# Altium PCB New Gyro 4.0.PcbDoc (part 1 of 2)
Units mm, origin at the board's own origin, x right, y up, seen from the top; angles counter-clockwise.
Board outline 67.56 x 93.22 mm, 4 copper layers (ANALOG, GND, VCC, DIGITAL); 253 components, 139 nets, 766 pads, 207 vias.
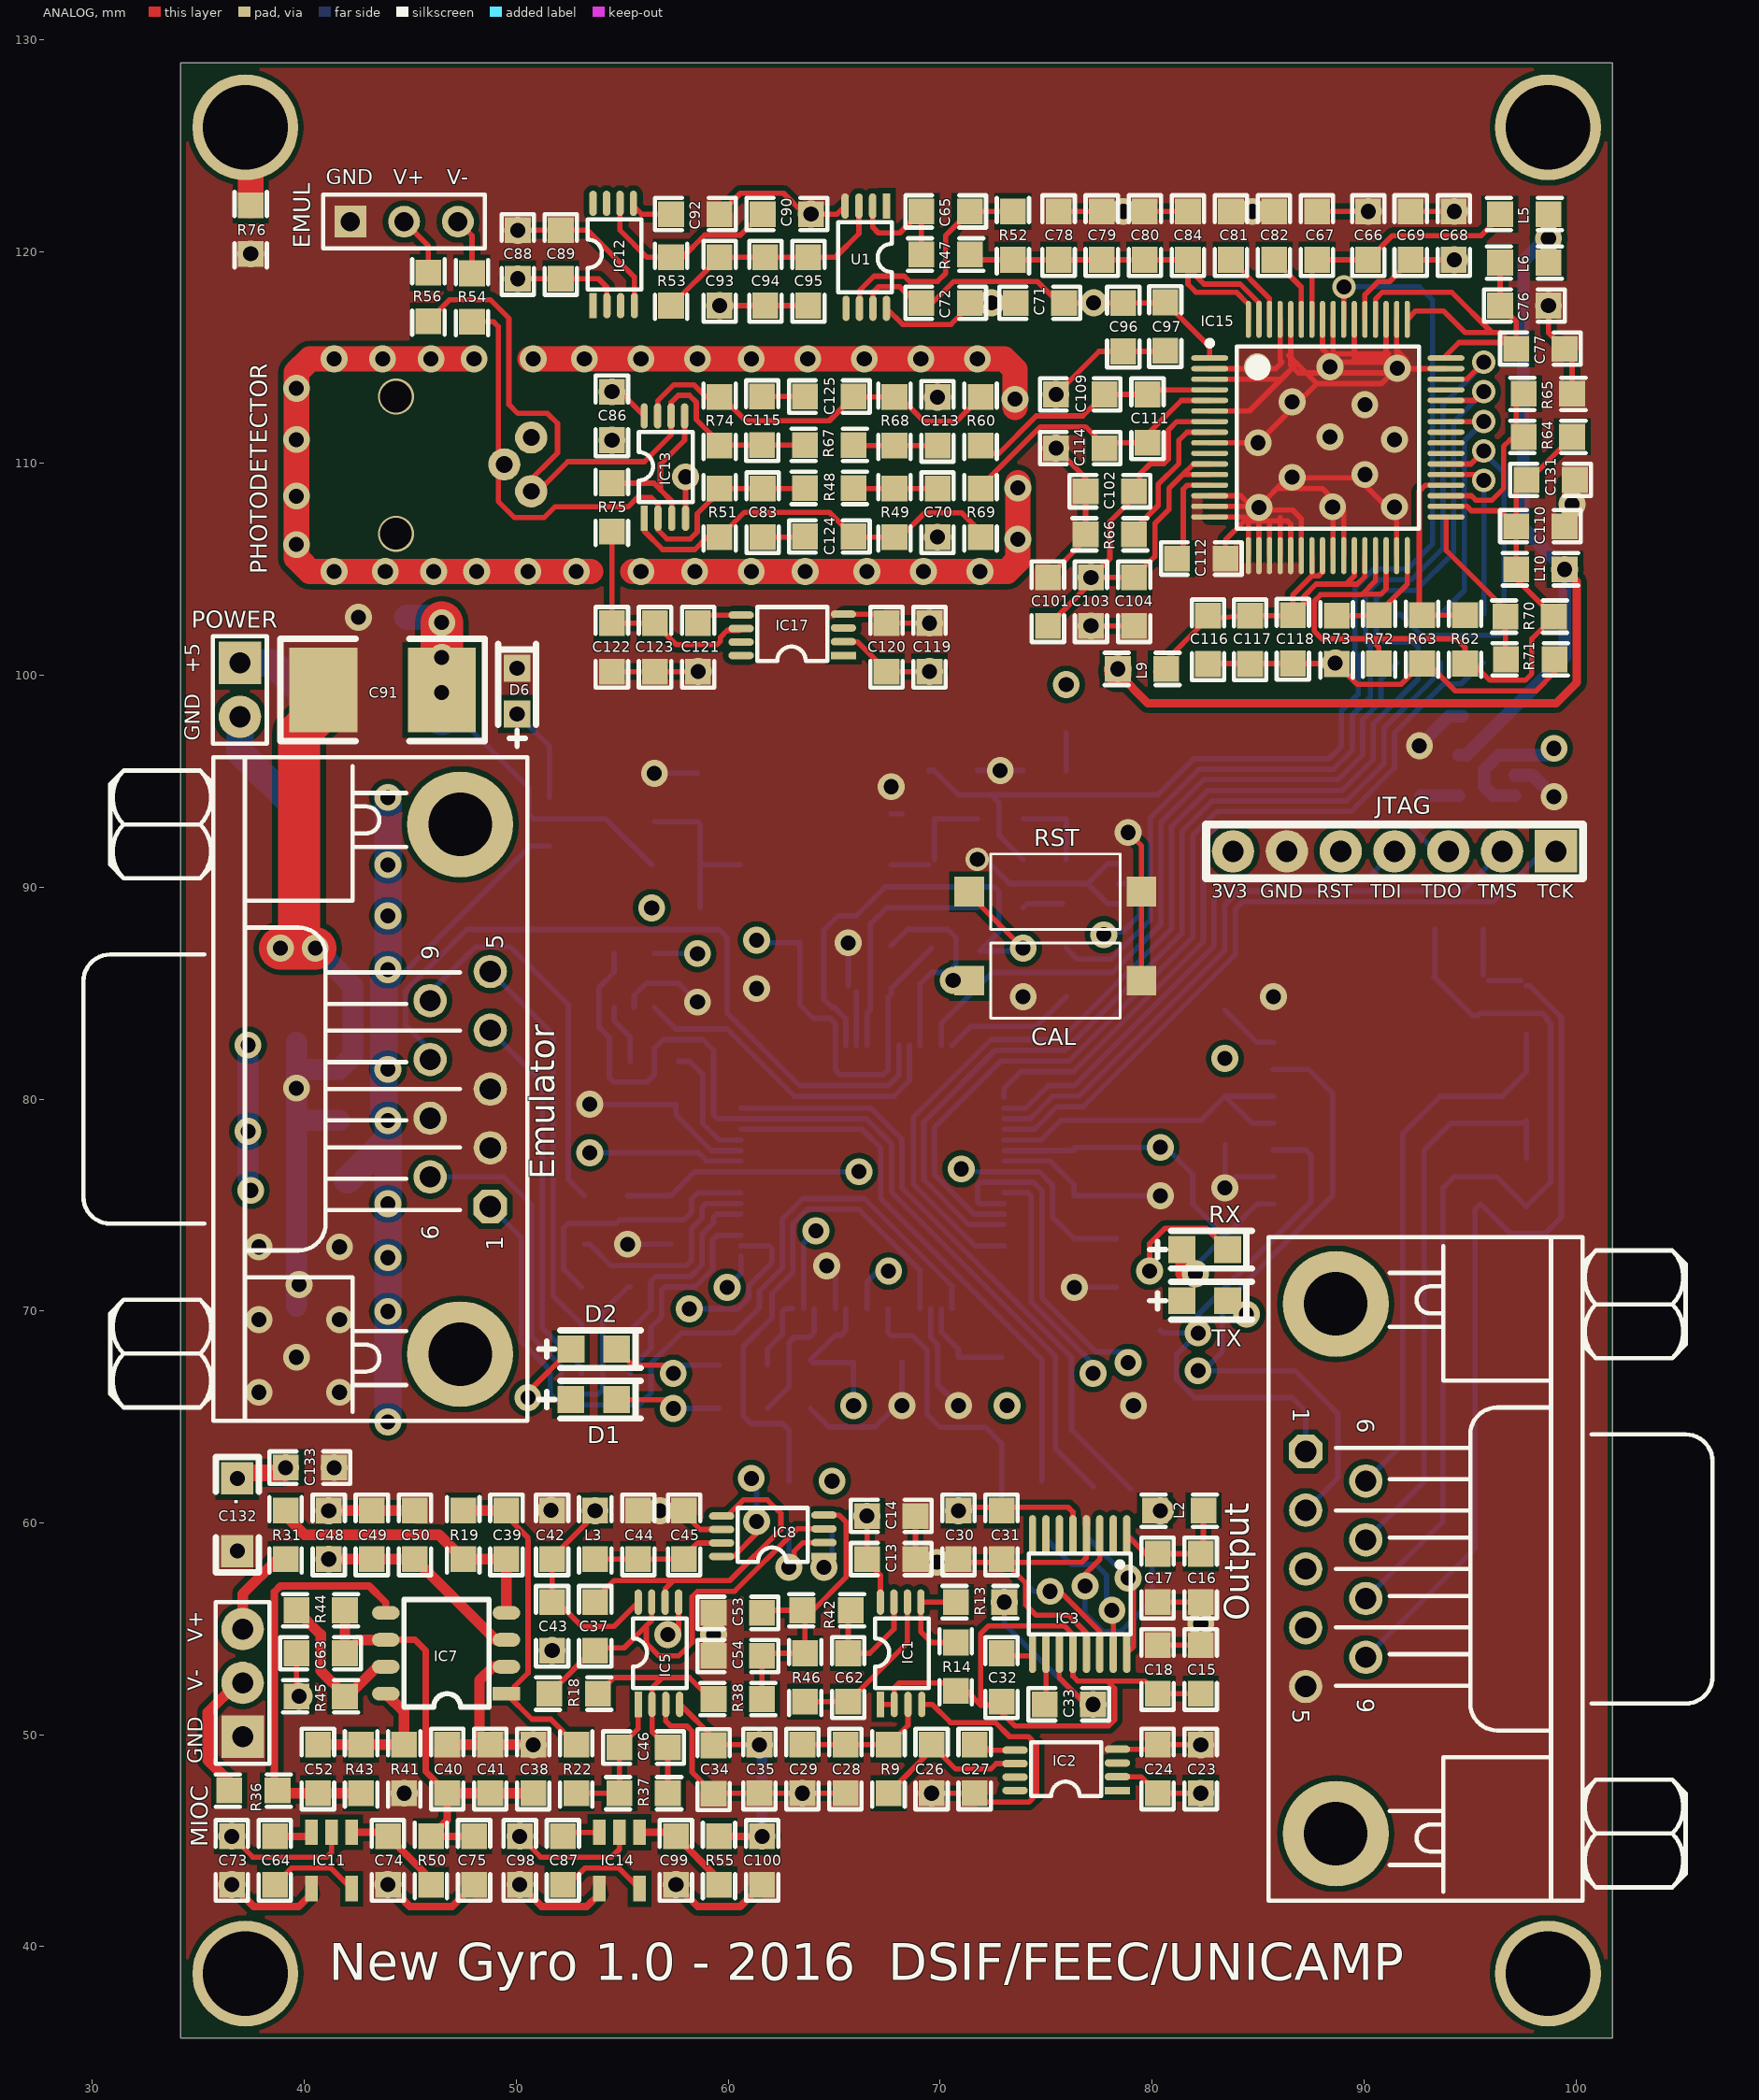
[diagram p0: ANALOG view]
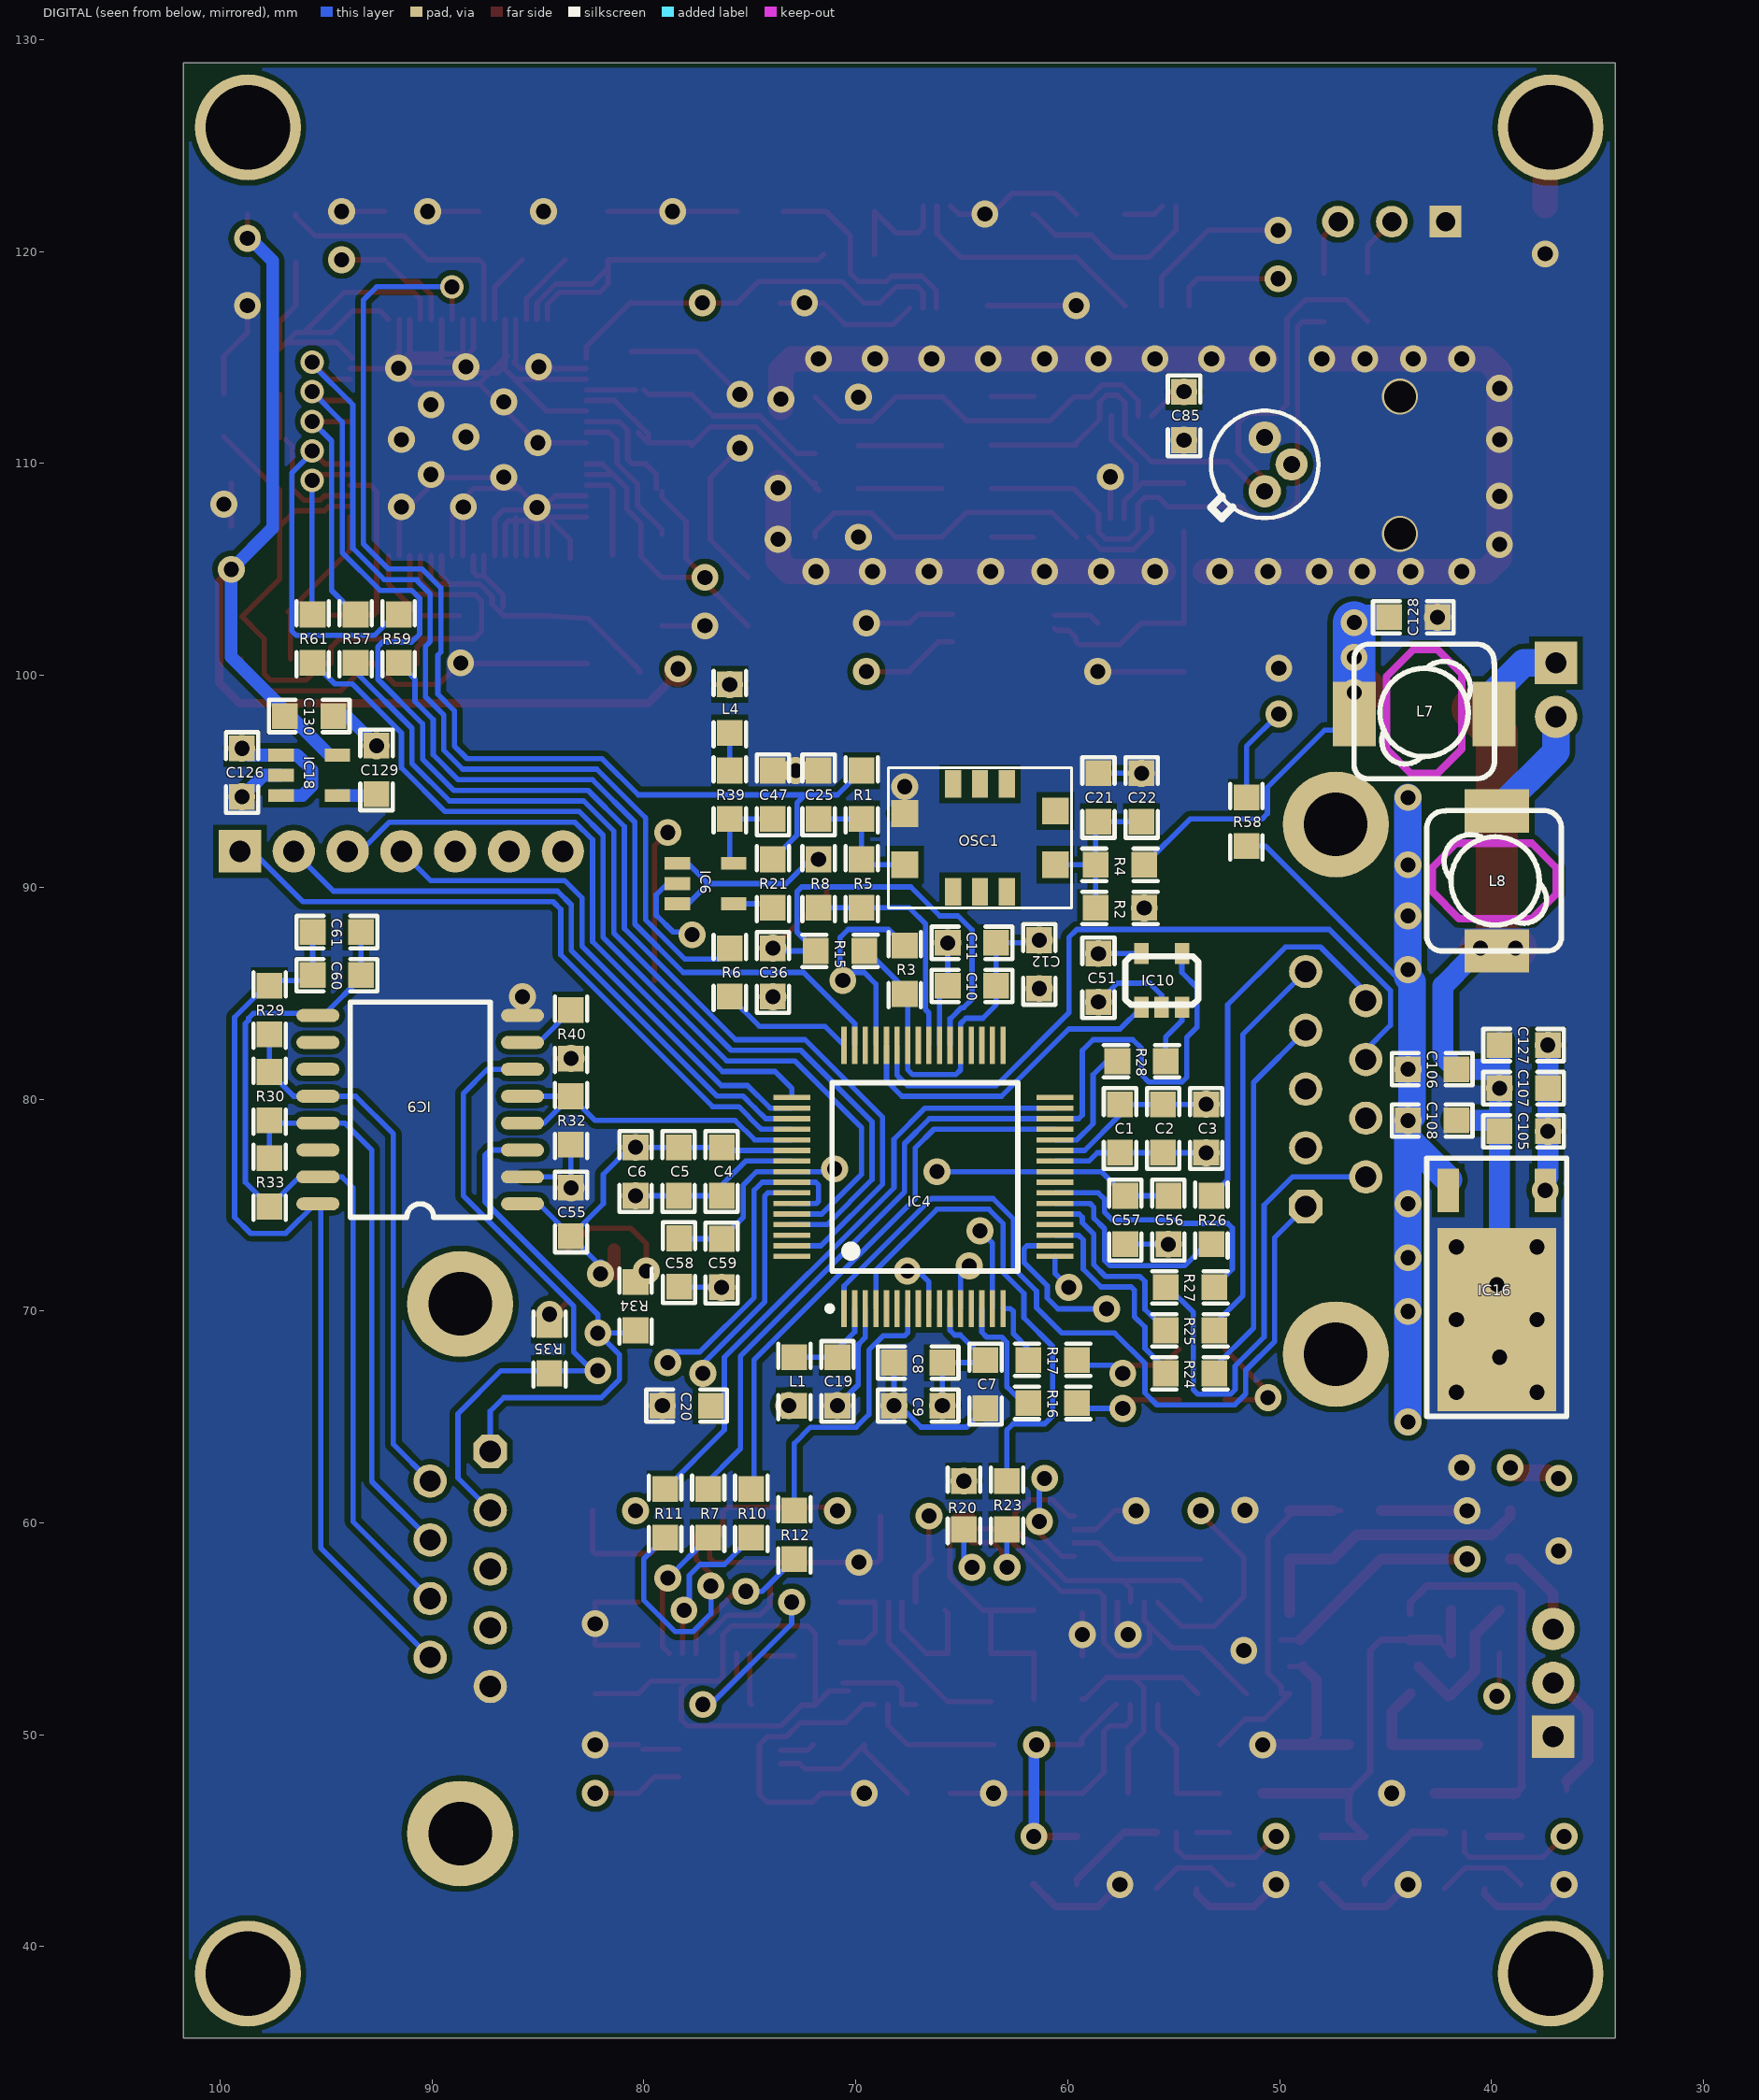
[diagram p1: DIGITAL view, seen from below]
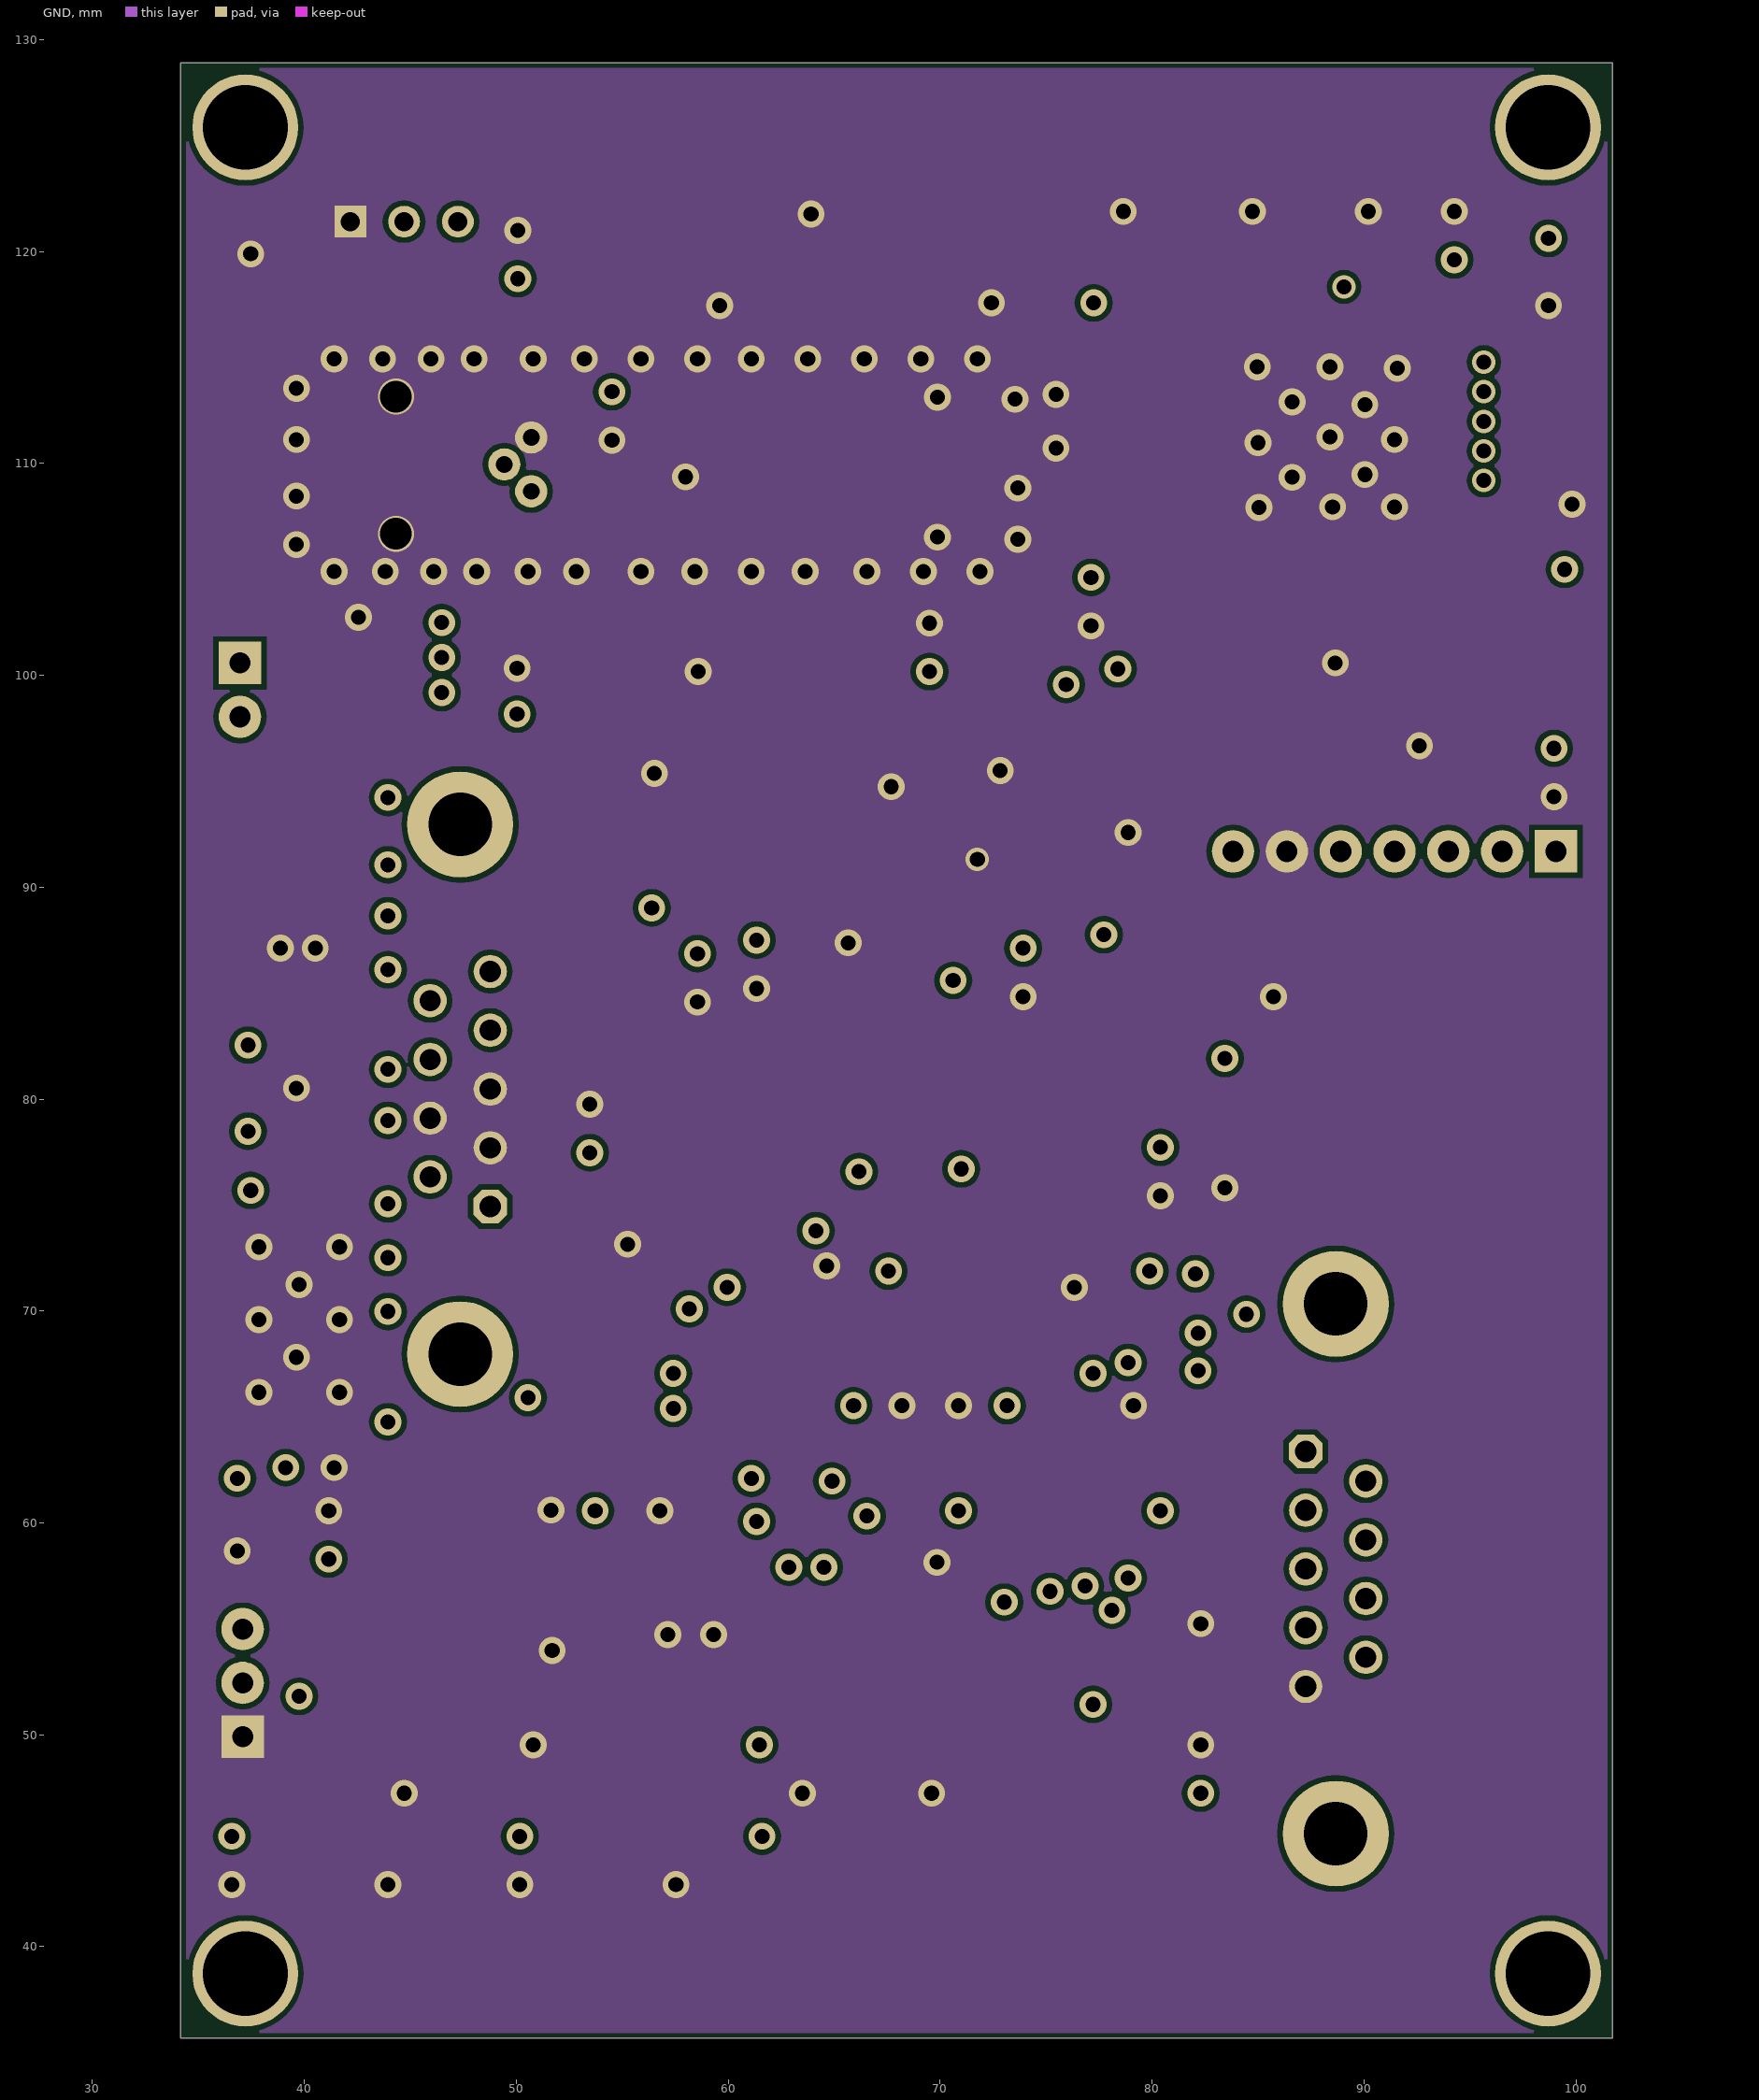
[diagram p2: GND]
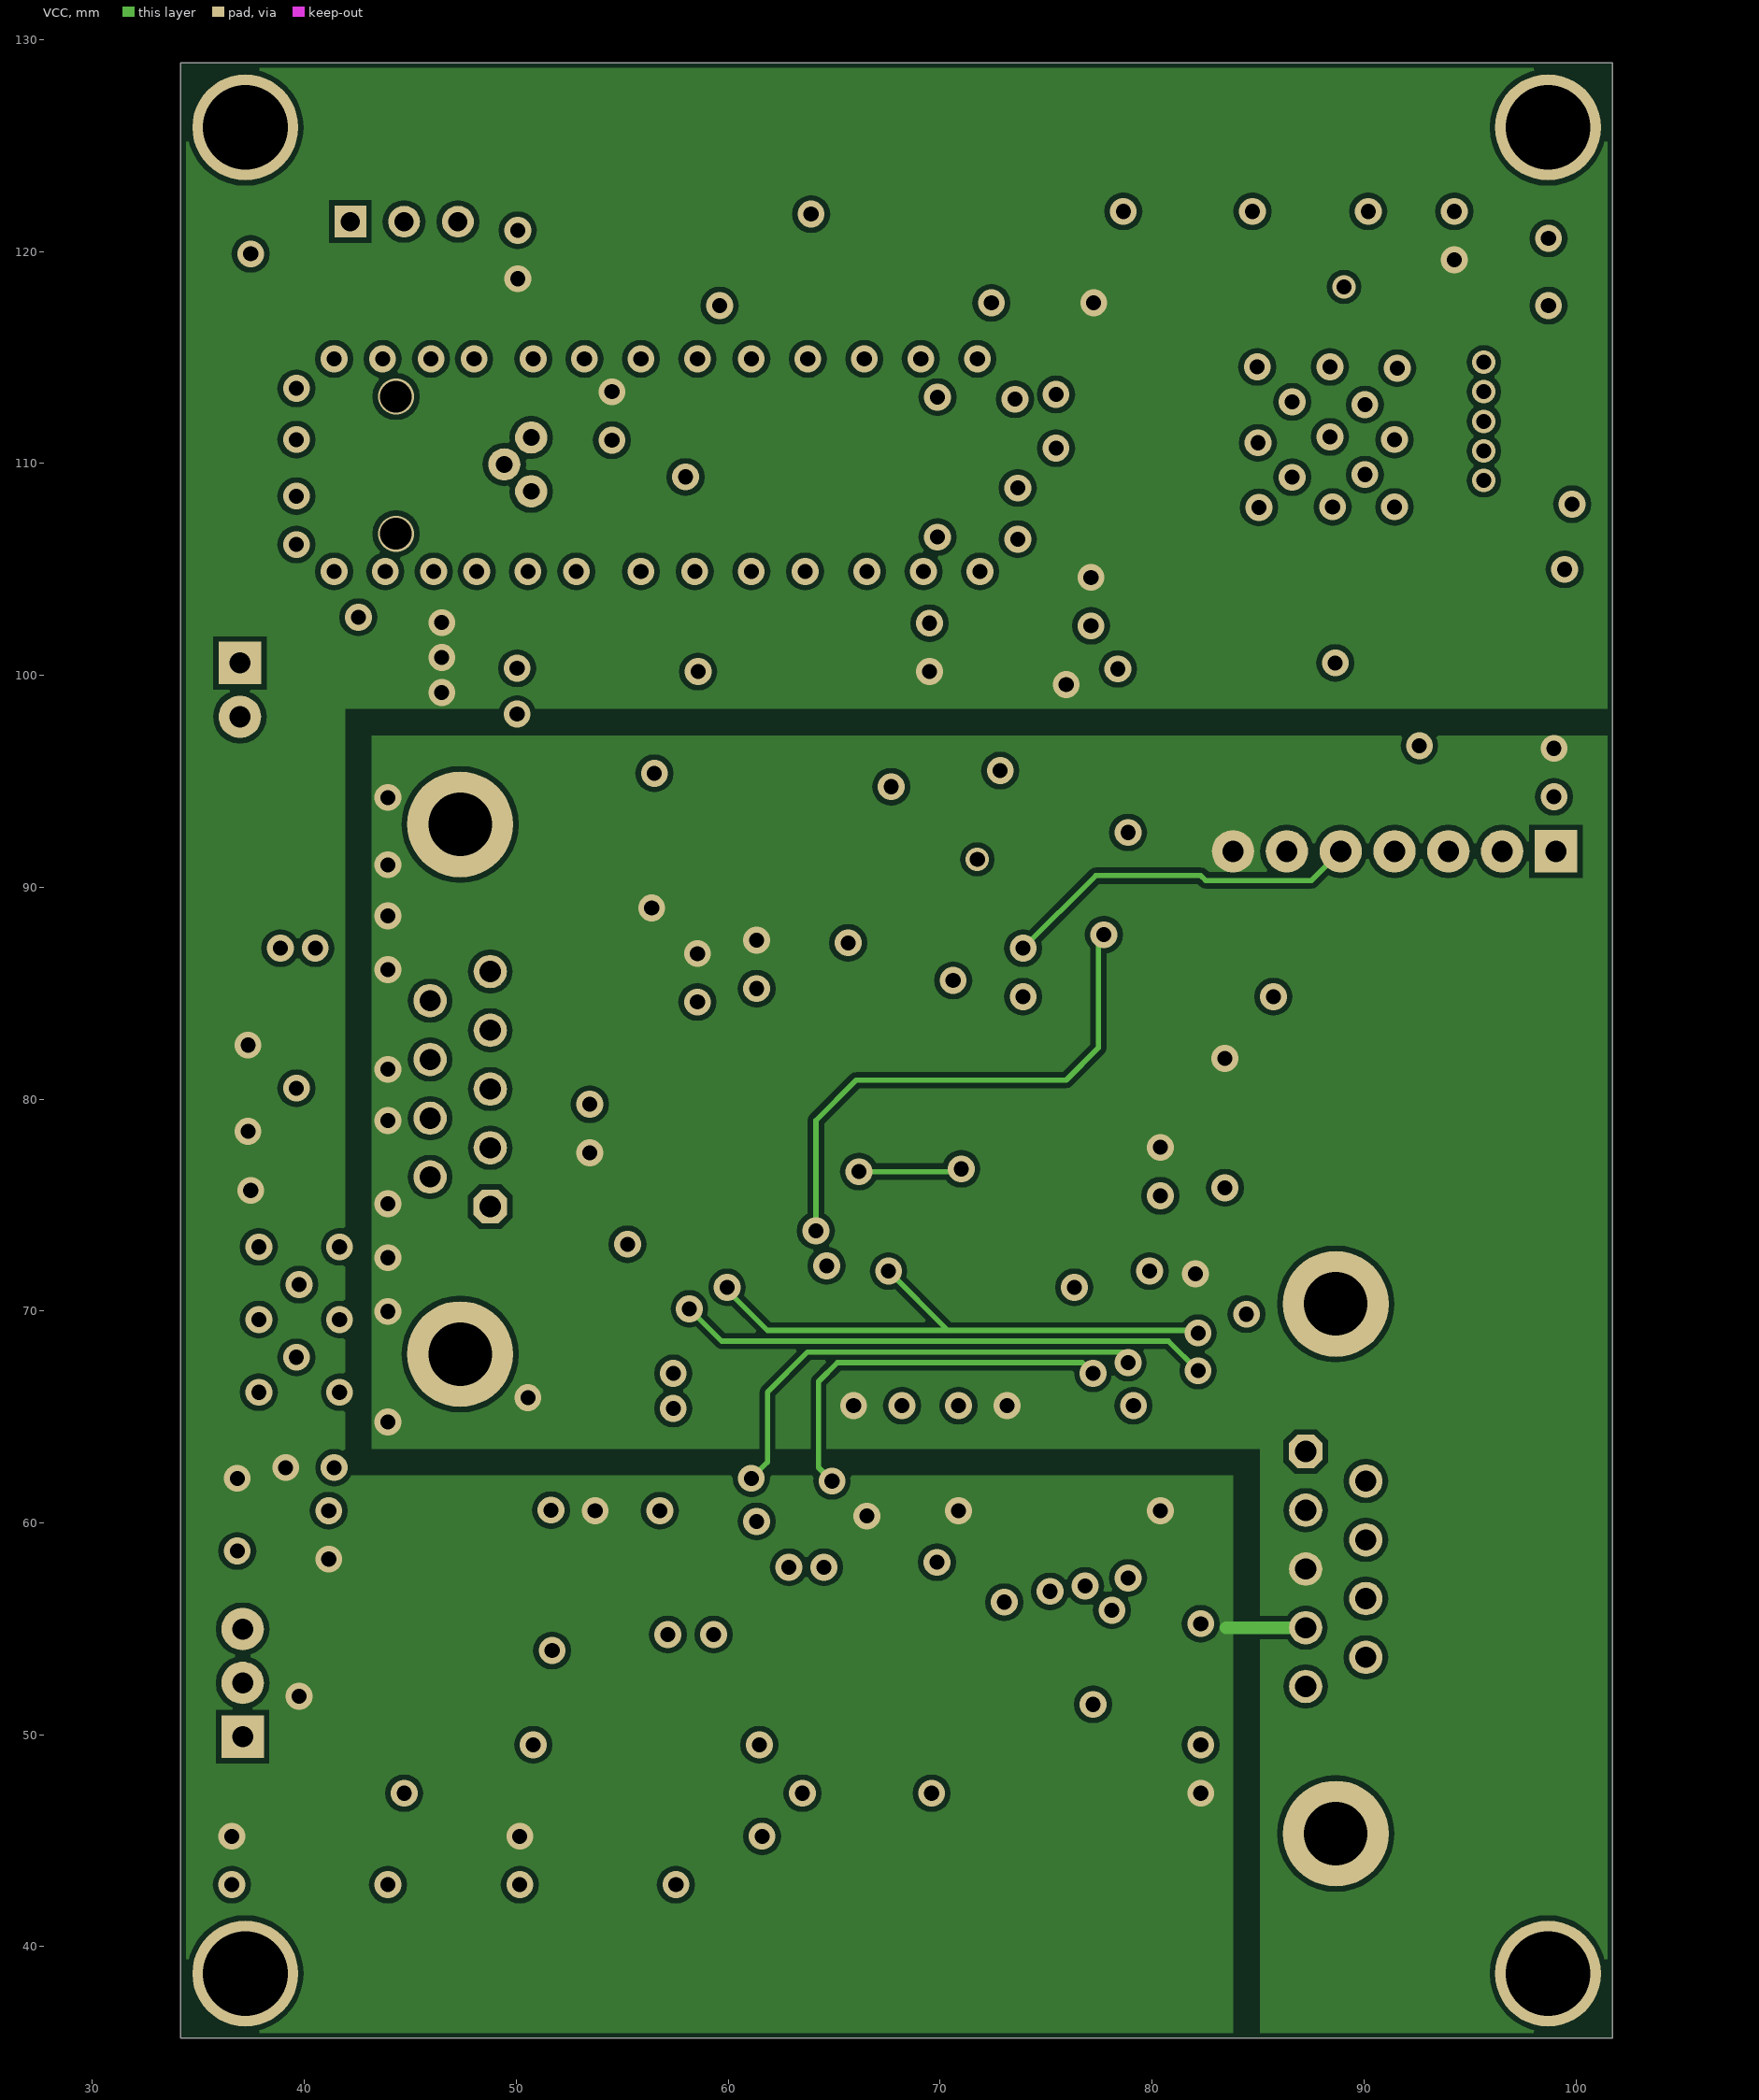
[diagram p3: VCC]

## Layer stack, top to bottom
ANALOG: signal copper 0.0356
Dielectric: core 0.32, FR-4, Dk 4.8
GND: signal copper 0.0356
Dielectric: prepreg 0.32, FR-4, Dk 4.8
VCC: signal copper 0.0356
Dielectric: core 0.32, FR-4, Dk 4.8
DIGITAL: signal copper 0.0356

## Board outline
34.163,35.687 34.163,128.905 101.727,128.905 101.727,35.687

## Design rules (kind name [scope] priority, off if disabled: settings)
Clearance [All] p1: gap=0.25
ComponentClearance [All] p1: gap=0.2 collisioncheckmode=3 verticalgap=0.2 showdistances=FALSE
HoleSize [All] p1: absolutevalues=TRUE maxlimit=3.3 minlimit=0.025 maxpercent=80.000 minpercent=20.000
PlaneConnect [All] p1: planeconnectstyle=Relief reliefexpansion=0.508 reliefentries=4 reliefconductorwidth=0.5 reliefairgap=0.3
PolygonConnect [All] p1: connectstyle=Direct reliefconductorwidth=1 reliefentries=4 polygonreliefangle="90 Angle" airgapwidth=0.3
RoutingVias [All] p1: holewidth=0.711 width=1.27 viastyle="Through Hole" minholewidth=0.711 minwidth=1.27 maxholewidth=0.711 maxwidth=1.27
SilkToSilkClearance [All] p1: silktosilkclearance=0.2
SilkToSolderMaskClearance [IsPad] p1: minsilkscreentomaskgap=0.2 clearancetoexposedcopper=TRUE
SolderMaskExpansion [All] p1: expansion=0.102
Width [All] p1: maxlimit=2 minlimit=0.25 preferedwidth=0.25
23 further rules are at their usual default settings.

## Components (designator, comment, footprint, x,y, rotation, side; value= is the part's Value field where it differs from the comment)
C1 "10n" 0805-cap 57.531,78.613 r270 bottom
C2 "100n" 0805-cap 55.499,78.613 r270 bottom
C3 "1u" 0805-cap 53.467,78.613 r270 bottom
C4 "10n" 0805-cap 76.327,76.581 r90 bottom
C5 "100n" 0805-cap 78.359,76.581 r90 bottom
C6 "1u" 0805-cap 80.391,76.581 r90 bottom
C7 "10n" 0805-cap 63.881,66.548 r90 bottom
C8 "100n" 0805-cap 67.056,67.564 r180 bottom
C9 "1u" 0805-cap 67.056,65.532 r180 bottom
C10 "10n" 0805-cap 64.516,85.344 r180 bottom
C11 "100n" 0805-cap 64.516,87.376 r180 bottom
C12 "1u" 0805-cap 61.341,86.36 r90 bottom
C13 "100n" 0805-cap 67.691,58.293 r180 top
C14 "1u" 0805-cap 67.691,60.325 r180 top
C15 "10u" 0805-cap 82.296,53.086 r270 top
C16 "1u" 0805-cap 82.296,57.404 r270 top
C17 "100n" 0805-cap 80.264,57.404 r270 top
C18 "100n" 0805-cap 80.264,53.086 r270 top
C19 "100n" 0805-cap 70.866,66.675 r90 bottom
C20 "20p" 0805-cap 77.978,65.532 r180 bottom
C21 "100n" 0805-cap 58.547,94.234 r270 bottom
C22 "10n" 0805-cap 56.515,94.234 r90 bottom
C23 "10u" 0805-cap 82.296,48.387 r90 top
C24 "100n" 0805-cap 80.264,48.387 r270 top
C25 "15p" 0805-cap 71.755,94.361 r270 bottom
C26 "22u" 0805-cap 69.596,48.387 r270 top
C27 "22u" 0805-cap 71.628,48.387 r270 top
C28 "22u" 0805-cap 65.532,48.387 r270 top
C29 "10n" 0805-cap 63.5,48.387 r90 top
C30 "4.7" 0805-cap 70.866,59.436 r90 top
C31 "100n" 0805-cap 72.898,59.436 r90 top
C32 "3.3n" 0805-cap 72.898,52.705 r270 top
C33 "10n" 0805-cap 76.073,51.435 r0 top
C34 "1u" 0805-cap 59.309,48.362 r90 top
C35 "100n" 0805-cap 61.468,48.387 r270 top
C36 "100n" 0805-cap 73.914,85.979 r270 bottom
C37 "20pF" 0805-cap 53.721,55.118 r90 top
C38 "1u" 0805-cap 50.8,48.387 r270 top
C39 "15pF" 0805-cap 49.53,59.436 r270 top
C40 "100n" 0805-cap 46.736,48.387 r90 top
C41 "10n" 0805-cap 48.768,48.387 r90 top
C42 "1u" 0805-cap 51.689,59.436 r270 top
C43 "100n" 0805-cap 51.689,55.118 r90 top
C44 "1u" 0805-cap 55.753,59.436 r270 top
C45 "100n" 0805-cap 57.912,59.436 r270 top
C46 "10pF" 0805-cap 56.007,49.403 r0 top
C47 "100n" 0805-cap 73.914,94.361 r270 bottom
C48 "1u" 0805-cap 41.148,59.436 r270 top
C49 "100n" 0805-cap 43.18,59.436 r90 top
C50 "10n" 0805-cap 45.212,59.436 r90 top
C51 "100n" 0805-cap 58.547,85.725 r90 bottom
C52 "15pF" 0805-cap 40.64,48.387 r270 top
C53 "22u" 0805-cap 60.452,55.753 r180 top
C54 "100n" 0805-cap 60.452,53.721 r0 top
C55 "100n" 0805-cap 83.439,74.676 r270 bottom
C56 "1u" 0805-cap 55.245,74.295 r90 bottom
C57 "100n" 0805-cap 57.277,74.295 r90 bottom
C58 "1u" 0805-cap 78.334,72.288 r90 bottom
C59 "100n" 0805-cap 76.327,72.263 r90 bottom
C60 "100n" 0805-cap 94.488,85.852 r180 bottom
C61 "10u" 0805-cap 94.488,87.884 r180 bottom
C62 "10n" 0805-cap 65.659,52.705 r270 top
C63 "100n" 0805-cap 40.767,53.848 r0 top
C64 "1uF" 0805-cap 38.608,44.069 r270 top
C65 "10n" 0805-cap 70.259,121.892 r0 top
C66 "4.7u" 0805-cap 90.198,120.749 r270 top
C67 "100n" 0805-cap 87.785,120.749 r270 top
C68 "4.7u" 0805-cap 94.234,120.749 r90 top
C69 "100n" 0805-cap 92.202,120.749 r90 top
C70 "1n" 0805-cap 69.878,107.668 r270 top
C71 "1u" 0805-cap 74.704,117.574 r180 top
C72 "100n" 0805-cap 70.259,117.574 r0 top
C73 "1uF" 0805-cap 36.576,44.069 r90 top
C74 "1uF" 0805-cap 43.942,44.069 r90 top
C75 "10u" 0805-cap 48.006,44.069 r270 top
C76 "4.7u" 0805-cap 97.564,117.447 r0 top
C77 "100n" 0805-cap 98.326,115.415 r0 top
C78 "47u" 0805-cap 75.593,120.749 r90 top
C79 "47u" 0805-cap 77.625,120.749 r90 top
C80 "22u" 0805-cap 79.657,120.749 r90 top
C81 "1u" 0805-cap 83.721,120.749 r270 top
C82 "1u" 0805-cap 85.753,120.749 r270 top
C83 "0.5p" 0805-cap 61.623,107.668 r90 top
C84 "100n" 0805-cap 81.689,120.749 r270 top
C85 "10u" 0805-cap 54.511,112.24 r270 bottom
C86 "100n" 0805-cap 54.511,112.24 r270 top
C87 "1uF" 0805-cap 52.197,44.069 r270 top
C88 "10u" 0805-cap 50.066,119.86 r90 top
C89 "100n" 0805-cap 52.098,119.86 r270 top
C90 "22u" 0805-cap 62.766,121.765 r0 top
C91 "1m" "CAP 1000u - duplicate" 47.244,99.949 r180 top
C92 "22u" 0805-cap 58.448,121.765 r0 top
C93 "47u" 0805-cap 59.591,118.59 r270 top
C94 "47u" 0805-cap 61.75,118.59 r270 top
C95 "10n" 0805-cap 63.782,118.59 r90 top
C96 "4.7u" 0805-cap 78.641,116.431 r270 top
C97 "100n" 0805-cap 80.622,116.456 r270 top
C98 "1uF" 0805-cap 50.165,44.069 r90 top
C99 "1uF" 0805-cap 57.531,44.069 r90 top
C100 "10u" 0805-cap 61.595,44.069 r270 top
C101 "4.7u" 0805-cap 75.085,103.477 r270 top
C102 "100n" 0805-cap 78.006,108.684 r0 top
C103 "10u" 0805-cap 77.117,103.477 r90 top
C104 "100n" 0805-cap 79.149,103.477 r90 top
C105 "100n" 0805-cap 38.481,78.486 r180 bottom
C106 "100n" 0805-cap 42.799,81.407 r0 bottom
C107 "10u" 0805-cap 38.481,80.518 r0 bottom
C108 "47u" 0805-cap 42.799,78.994 r180 bottom
C109 "100p" 0805-cap 76.609,113.256 r180 top
C110 "100n" 0805-cap 98.326,107.033 r0 top
C111 "750p" 0805-cap 79.784,112.113 r270 top
C112 "1u" 0805-cap 82.324,105.509 r0 top
C113 "1n" 0805-cap 69.878,111.986 r90 top
C114 "100p" 0805-cap 76.609,110.716 r180 top
C115 "0.5p" 0805-cap 61.595,112.014 r270 top
C116 "10u" 0805-cap 82.642,101.674 r270 top
C117 "100n" 0805-cap 84.623,101.674 r270 top
C118 "100n" 0805-cap 86.642,101.699 r270 top
C119 "10u" 0805-cap 69.497,101.318 r90 top
C120 "100n" 0805-cap 67.465,101.318 r270 top
C121 "10u" 0805-cap 58.575,101.318 r270 top
C122 "10u" 0805-cap 54.511,101.318 r90 top
C123 "100n" 0805-cap 56.543,101.318 r90 top
C124 "0.5p" 0805-cap 64.77,106.553 r180 top
C125 "0.5p" 0805-cap 64.77,113.157 r180 top
C126 "1u" 0805-cap 98.966,95.41 r90 bottom
C127 "10u" 0805-cap 38.481,82.55 r0 bottom
C128 "100n" 0805-cap 43.688,102.743 r0 bottom
C129 "10n" 0805-cap 92.616,95.537 r270 bottom
C130 "2.2u" 0805-cap 95.791,98.077 r0 bottom
C131 "4.7u" 0805-cap 98.806,109.22 r180 top
C132 "100u" 1206_Capacitor 36.83,60.452 r270 top
C133 "100n" 0805-cap 40.259,62.611 r180 top
CAL "SW-PB" "SW SMD" 75.565,85.598 r0 top
D1 "STATUS2" LED 52.575,65.817 r0 top
D2 "STATUS" LED 52.578,68.199 r0 top
D6 "Power" LED 50.038,98.171 r90 top
EMUL "Header 4" HDR1X3#1 42.164,121.412 r0 top
Emulator "DB9" DB9FLW 48.768,74.93 r90 top
IC1 "OPA2211 or OPA2209" MSOP8 67.183,51.308 r90 top
IC2 "REF5025" MSOP8 78.486,47.371 r180 top
IC3 "DAC1220" "DBQ 16 TI" 76.581,56.642 r270 top
IC4 "TM4C123GH6PM" PQFP64 66.802,76.327 r90 bottom
IC5 "OPA2140 ou AD8620" MSOP8 55.753,51.308 r90 top
IC6 "SN74LV1T125" SOT-23-5 77.089,90.17 r180 bottom
IC7 "LMP8350 ou THS4130" SO-8 49.53,51.943 r180 top
IC8 "AD5543" MSOP8 64.643,58.42 r180 top
IC9 "ADM2483" SOL-16 85.725,75.057 r0 bottom
IC10 "LM95071" SOT-23 56.515,84.328 r180 bottom
IC11 "TPS60402" SOT-23-5 41.275,44.069 r270 top
IC12 "REF5030" MSOP8 53.622,117.32 r90 top
IC13 "OPA2354, OPA2356 talvez OPA2140" MSOP8 56.035,107.287 r90 top
IC14 "TPS60402" SOT-23-5 54.864,44.069 r270 top
IC15 "ADS1672" TM4C123GH6PM_PQFP64 88.293,111.224 r0 top
IC16 "TLV2217-33KTPR" KTP 37.465,75.692 r0 bottom
IC17 "REF5025" MSOP8 65.56,100.937 r180 top
IC18 "LP2985" SOT-23-5 95.791,95.283 r180 bottom
JTAG "JTAG_ARM" HDR1X7 99.06,91.694 r180 top
L1 "3.9uH" 0805 72.898,66.675 r90 bottom
L2 "1uH" 0805 81.28,60.579 r0 top
L3 "1uH" 0805 53.721,59.436 r270 top
L4 "1uH" 0805 75.946,98.425 r270 bottom
L5 "1uH" 0805 97.564,121.765 r180 top
L6 "1uH" 0805 97.564,119.479 r0 top
L7 "10uH" SPD62 46.482,98.171 r180 bottom
L8 "10uH" SPD62 39.751,86.995 r90 bottom
L9 "1uH" 0805 79.53,100.302 r0 top
L10 "1uH" 0805 98.326,105.001 r0 top
MIOC "Header 3" HDR1X3#2 37.084,49.911 r90 top
OSC1 "XTAL_10MHz" OSC_D75A_ 64.135,92.71 r0 bottom
Output "DB9" DB9FLW 87.249,63.373 r270 top
PHOTODETECTOR "BPX65" otico 50.701,108.684 r0 top
POWER "Header 2" HDR1X2 36.957,100.584 r270 top
R1 "50R" 0805 69.723,94.361 r90 bottom
R2 "0R" 0805 57.531,89.027 r180 bottom
R3 "10k" 0805 67.691,86.106 r90 bottom
R4 "0R" 0805 57.531,91.059 r180 bottom
R5 "1k" 0805 69.723,90.17 r270 bottom
R6 "50R" 0805 75.946,85.979 r270 bottom
R7 "100" 0805 76.962,60.452 r90 bottom
R8 "2k" 0805 71.755,90.17 r270 bottom
R9 "100" 0805 67.564,48.387 r90 top
R10 "100" 0805 74.93,60.452 r90 bottom
R11 "100" 0805 78.994,60.452 r90 bottom
R12 "100" 0805 72.898,59.436 r90 bottom
R13 "20k" 0805 71.882,56.261 r0 top
R14 "5k" 0805 70.739,53.213 r270 top
R15 "10k" 0805 70.739,86.995 r0 bottom
R16 "1k" 0805 60.706,65.659 r180 bottom
R17 "1k" 0805 60.706,67.691 r180 bottom
R18 "5k" 0805 52.705,51.943 r180 top
R19 "5k" 0805 47.498,59.436 r90 top
R20 "100" 0805 64.897,60.833 r270 bottom
R21 "50R" 0805 73.914,90.17 r90 bottom
R22 "1k5" 0805 52.832,48.387 r270 top
R23 "100" 0805 62.865,60.833 r270 bottom
R24 "0" 0805 54.229,67.056 r0 bottom
R25 "50R" 0805 54.229,69.088 r0 bottom
R26 "0" 0805 53.213,74.295 r270 bottom
R27 "50R" 0805 54.229,71.12 r180 bottom
R28 "50R" 0805 56.515,81.788 r0 bottom
R29 "470" 0805 97.663,84.201 r90 bottom
R30 "120" 0805 97.663,80.137 r270 bottom
R31 "20" 0805 39.116,59.436 r90 top
R32 "1k5" 0805 83.439,78.994 r90 bottom
R33 "470" 0805 97.663,76.073 r90 bottom
R34 "1k" 0805 80.391,70.231 r90 bottom
R35 "1k" 0805 84.455,68.199 r90 bottom
R36 "20" 0805 37.592,47.371 r0 top
R37 "10k" 0805 56.007,47.244 r0 top
R38 "10k" 0805 60.452,51.689 r180 top
R39 "10R" 0805 75.946,94.361 r270 bottom
R40 "0" 0805 83.439,83.058 r270 bottom
R41 "1k5" 0805 44.704,48.387 r270 top
R42 "100" 0805 64.643,55.88 r0 top
R43 "5k" 0805 42.672,48.387 r90 top
R44 "inf" 0805 40.767,55.88 r0 top
R45 "0" 0805 40.767,51.816 r0 top
R46 "1k" 0805 63.627,52.705 r270 top
R47 "1k" 0805 70.259,119.86 r0 top
R48 "~33k 1%" 0805 64.77,108.839 r0 top
R49 "1k 1%" 0805 67.846,107.668 r270 top
R50 "10" 0805 45.974,44.069 r90 top
R51 "100k 1%" 0805 59.591,107.668 r270 top
R52 "100" 0805 73.434,120.749 r270 top
R53 "100" 0805 57.305,118.59 r270 top
R54 "100k 1%" 0805 47.907,117.828 r270 top
R55 "10" 0805 59.563,44.069 r90 top
R56 "100k 1%" 0805 45.847,117.856 r90 top
R57 "50R" 0805 93.599,101.727 r270 bottom
R58 "2M" 0805 51.562,93.091 r270 bottom
R59 "50R" 0805 91.567,101.727 r270 bottom
R60 "10" 0805 71.91,111.986 r270 top
R61 "50R" 0805 95.631,101.727 r270 bottom
R62 "10k" 0805 94.77,101.699 r90 top
R63 "0" 0805 92.738,101.699 r90 top
R64 "10k" 0805 98.679,111.252 r180 top
R65 "0" 0805 98.679,113.284 r180 top
R66 "7.5k" 0805 78.006,106.652 r0 top
R67 "~33k 1%" 0805 64.77,110.871 r0 top
R68 "1k 1%" 0805 67.846,111.986 r90 top
R69 "" 0805 71.91,107.668 r90 top
R70 "10k" 0805 97.818,102.771 r180 top
R71 "0" 0805 97.843,100.752 r180 top
R72 "10k" 0805 90.706,101.699 r90 top
R73 "0" 0805 88.713,101.674 r90 top
R74 "100k 1%" 0805 59.591,111.986 r90 top
R75 "0R" 0805 54.511,107.922 r270 top
R76 "1k" 0805 37.465,121.031 r270 top
RST "SW-PB" "SW SMD" 75.565,89.789 r0 top
RX "RX" LED 81.407,72.898 r0 top
TX "TX" LED 81.407,70.485 r0 top
U1 "OPA211" MSOP8 67.465,122.273 r270 top

## Footprints (in the part's own frame and the unit in brackets; to place one, negate y for a bottom-side part, rotate by r counter-clockwise, add the part's x,y. Pads: shape width x height; smd on the part's side, far side on the other; paste and mask are expansions set on the pad)
0805 [mil]
  rect 48x48 smd: 1(-45,0) 2(45,0)
  silkscreen extent -70,-30 70,30
0805-cap [mil]
  rect 48x48 smd: 1(-45,0) 2(45,0)
  silkscreen extent -75,-30 75,30
1206_Capacitor [mil]
  rect 60x60 smd: 1(-65,0) 2(70,0)
  silkscreen extent -105,-40 110,40
"CAP 1000u - duplicate" [mm]
  rect 3.2x4 smd: 1(0.762,0.635) 2(6.35,0.635)
  silkscreen extent -1.27,-1.78 8.38,3.05
DB9FLW [mil]
  oct 62x62 hole 39.37: 1(0,0)
  round 62 hole 39.37: 2(109.17,0) 3(218.33,0) 4(327.5,0) 5(436.67,0) 6(55,111.67) 7(164.17,111.67) 8(273.33,111.67) 9(382.5,111.67)
  round 196.67 hole 118.11: BO1(-274.17,55.83) BO2(710,55.83)
  silkscreen extent -398,-69 835,756
"DBQ 16 TI" [mm]
  oval 1.85x0.35 smd: 1(-2.8,2.222) 2(-2.8,1.587) 3(-2.8,0.952) 4(-2.8,0.317) 5(-2.8,-0.318) 6(-2.8,-0.953) 7(-2.8,-1.588) 8(-2.8,-2.223) 9(2.8,-2.222) 10(2.8,-1.587) 11(2.8,-0.952) 12(2.8,-0.317) 13(2.8,0.318) 14(2.8,0.953) 15(2.8,1.588) 16(2.8,2.223)
  silkscreen extent -1.91,-2.4 1.91,2.4
HDR1X2 [mm] "Connector; Header; 2 Position"
  rect 2x2 hole 1: 1(0,0)
  round 2 hole 1: 2(2.54,0)
  silkscreen extent -1.27,-1.27 3.81,1.27
HDR1X3#1 [mm] "Connector; Header; 3 Position"
  rect 1.5x1.5 hole 0.9: 1(0,0)
  round 1.5 hole 0.9: 2(2.54,0) 3(5.08,0)
  silkscreen extent -1.27,-1.27 6.35,1.27
HDR1X3#2 [mm] "Connector; Header; 3 Position"
  rect 2x2 hole 1: 1(0,0)
  round 2 hole 1: 2(2.54,0) 3(5.08,0)
  silkscreen extent -1.27,-1.27 6.35,1.27
HDR1X7 [mm] "Connector; Header; 6 Position"
  rect 2x2 hole 1: 1(0,0)
  round 2 hole 1: 2(2.54,0) 3(5.08,0) 4(7.62,0) 5(10.16,0) 6(12.7,0) 7(15.24,0)
  silkscreen extent -1.27,-1.27 16.51,1.27
KTP [mil]
  rect 40x80 smd: 1(0,0) 3(180,0)
  rect 220x340 smd: 2(90,240)
  silkscreen extent -40,-60 220,420
LED [mil]
  rect 50x50 smd: A(0,0) K(85,0)
  silkscreen extent -60,-35 130,35
MSOP8 [mm]
  rect 1.2x0.35 smd: 1(0.127,0)
  oval 1.2x0.35 smd: 2(0.127,-0.65) 3(0.127,-1.3) 4(0.127,-1.95) 5(4.953,-1.905) 6(4.953,-1.27) 7(4.953,-0.635) 8(4.953,0)
  silkscreen extent 0.89,-2.29 4.19,0.25
OSC_D75A_ [mil]
  rect 30x51 smd: 1(-50,-85) 2(0,-85) 3(50,-85) 6(50,115) 7(0,115) 8(-50,115)
  rect 50x50 smd: 4(140,-30) 5(140,65) 9(-140,65) 10(-140,-35)
  silkscreen extent -170,-115 170,145
otico [mil]
  round 60 hole 31: A(0,0) K(-50,50) S(0,100)
PQFP64 [mm]
  rect 1.75x0.25 smd: 1(-6.21,3.75) 2(-6.21,3.25) 3(-6.21,2.75) 4(-6.21,2.25) 5(-6.21,1.75) 6(-6.21,1.25) 7(-6.21,0.75) 8(-6.21,0.25) 9(-6.21,-0.25) 10(-6.21,-0.75) 11(-6.21,-1.25) 12(-6.21,-1.75) 13(-6.21,-2.25) 14(-6.21,-2.75) 15(-6.21,-3.25) 16(-6.21,-3.75) 33(6.21,-3.75) 34(6.21,-3.25) 35(6.21,-2.75) 36(6.21,-2.25) 37(6.21,-1.75) 38(6.21,-1.25) 39(6.21,-0.75) 40(6.21,-0.25) 41(6.21,0.25) 42(6.21,0.75) 43(6.21,1.25) 44(6.21,1.75) 45(6.21,2.25) 46(6.21,2.75) 47(6.21,3.25) 48(6.21,3.75)
  rect 0.25x1.75 smd: 17(-3.75,-6.21) 18(-3.25,-6.21) 19(-2.75,-6.21) 20(-2.25,-6.21) 21(-1.75,-6.21) 22(-1.25,-6.21) 23(-0.75,-6.21) 24(-0.25,-6.21) 25(0.25,-6.21) 26(0.75,-6.21) 27(1.25,-6.21) 28(1.75,-6.21) 29(2.25,-6.21) 30(2.75,-6.21) 31(3.25,-6.21) 32(3.75,-6.21) 49(3.75,6.21) 50(3.25,6.21) 51(2.75,6.21) 52(2.25,6.21) 53(1.75,6.21) 54(1.25,6.21) 55(0.75,6.21) 56(0.25,6.21) 57(-0.25,6.21) 58(-0.75,6.21) 59(-1.25,6.21) 60(-1.75,6.21) 61(-2.25,6.21) 62(-2.75,6.21) 63(-3.25,6.21) 64(-3.75,6.21)
  silkscreen extent -6.33,-4.44 4.44,4.55
SO-8 [mm]
  rect 1.3x0.65 smd: 1(0,0)
  oval 1.3x0.65 smd: 2(0,-1.27) 3(0,-2.54) 4(0,-3.81) 5(5.69,-3.81) 6(5.69,-2.54) 7(5.69,-1.27) 8(5.69,0)
  silkscreen extent 0.81,-4.44 4.83,0.64
SOL-16 [mil]
  oval 80x24 smd: 1(0,0) 2(0,-50) 3(0,-100) 4(0,-150) 5(0,-200) 6(0,-250) 7(0,-300) 8(0,-350) 9(380,-350) 10(380,-300) 11(380,-250) 12(380,-200) 13(380,-150) 14(380,-100) 15(380,-50) 16(380,0)
  silkscreen extent 60,-375 320,25
SOT-23 [mil]
  rect 27x39 smd: 1(0,0) 2(37.5,0) 3(75,0) 4(75,100) 5(0,100)
  silkscreen extent -30,5 105,95
SOT-23-5 [mm] "SOT23, 5-Leads, Body 2,90x2,80mm, Pitch 0,95mm, IPC Medium Density"
  rect 1.2x0.6 smd: 1(-1.327,0.95) 2(-1.327,0) 3(-1.327,-0.95) 4(1.327,-0.95) 5(1.327,0.95)
  body extent -0.87,-1.52 0.87,1.53, height 1.45
SPD62 [mil]
  rect 80x120 smd: 1(0,0) 2(260,0)
  ANALOG keep-out lines w14: 200,-65 155,-110 105,-110 60,-65 60,70 110,120 155,120 200,75 200,-65
  silkscreen extent 0,-120 261,130
"SW SMD" [mm] "smal switch smd"
  rect 1.4x1.4 smd: 1(-4.191,0) 2(3.937,0)
  silkscreen extent -3.17,-1.78 2.92,1.78
TM4C123GH6PM_PQFP64 [mm] "PQFP64 - ARM M4F Texas Microcontroller"
  oval 1.75x0.25 smd: 1(-5.575,3.75) 2(-5.575,3.25) 3(-5.575,2.75) 4(-5.575,2.25) 5(-5.575,1.75) 6(-5.575,1.25) 7(-5.575,0.75) 8(-5.575,0.25) 9(-5.575,-0.25) 10(-5.575,-0.75) 11(-5.575,-1.25) 12(-5.575,-1.75) 13(-5.575,-2.25) 14(-5.575,-2.75) 15(-5.575,-3.25) 16(-5.575,-3.75) 33(5.575,-3.75) 34(5.575,-3.25) 35(5.575,-2.75) 36(5.575,-2.25) 37(5.575,-1.75) 38(5.575,-1.25) 39(5.575,-0.75) 40(5.575,-0.25) 41(5.575,0.25) 42(5.575,0.75) 43(5.575,1.25) 44(5.575,1.75) 45(5.575,2.25) 46(5.575,2.75) 47(5.575,3.25) 48(5.575,3.75)
  oval 0.25x1.75 smd: 17(-3.75,-5.575) 18(-3.25,-5.575) 19(-2.75,-5.575) 20(-2.25,-5.575) 21(-1.75,-5.575) 22(-1.25,-5.575) 23(-0.75,-5.575) 24(-0.25,-5.575) 25(0.25,-5.575) 26(0.75,-5.575) 27(1.25,-5.575) 28(1.75,-5.575) 29(2.25,-5.575) 30(2.75,-5.575) 31(3.25,-5.575) 32(3.75,-5.575) 49(3.75,5.575) 50(3.25,5.575) 51(2.75,5.575) 52(2.25,5.575) 53(1.75,5.575) 54(1.25,5.575) 55(0.75,5.575) 56(0.25,5.575) 57(-0.25,5.575) 58(-0.75,5.575) 59(-1.25,5.575) 60(-1.75,5.575) 61(-2.25,5.575) 62(-2.75,5.575) 63(-3.25,5.575) 64(-3.75,5.575)
  silkscreen extent -5.7,-4.3 4.3,4.57, body extent -5,-5 5,5, height 1.45

## Part data
C1 C2 C3 C4 C5 C6 C7 C8 C9 C10 C11 C12 C13 C14 C15 C16 C17 C18 C19 C20 C21 C22 C23 C24 C25 C29 C30 C31 C32 C33 C34 C35 C36 C37 C38 C39 C40 C41 C42 C43 C44 C45 C46 C47 C48 C49 C50 C51 C52 C54 C55 C56 C57 C58 C59 C60 C62 C63 C64 C65 C66 C67 C68 C69 C70 C71 C72 C73 C74 C75 C76 C77 C81 C82 C83 C84 C85 C86 C87 C88 C89 C95 C96 C97 C98 C99 C100 C101 C102 C103 C104 C105 C106 C109 C110 C111 C112 C113 C114 C115 C116 C117 C118 C119 C120 C121 C122 C123 C124 C125 C126 C128 C129 C130 C131 C133: library part CAP, "Capacitor Thick film"
C26 C27 C28 C53 C78 C79 C80 C90 C91 C92 C93 C94 C107 C108 C127 C132: library part CAPT, "Capacitor Tântalo SMD"
C61: library part "CAPACITOR POL", "Capacitor Tântalo"
CAL RST: library part SW
D1 D2 D6 RX TX: library part LED_CV, "SMD LED 0805 package"
EMUL: library part "Header 3", "Header, 3-Pin"
IC1 IC5 IC13: library part AMPOPDUAL
IC2 IC12 IC17: library part ADR440AMZ
IC4: "ARM M4F Texas"
IC6: "Single Power Supply Single Buffer Gate with 3-State Output CMOS Logic  Level Shifter"
IC7: library part THS4505, "WIDEBAND, LOW-DISTORTION, FULLY DIFFERENTIAL AMPLIFIER"
IC8: "16 Bit SPI DAC"
IC11 IC14: library part TPS60401, "Charge Pump Inverter"
IC15: "625kSPS, 24-Bit Analog-to-Digital Converter"
IC16: library part LM78L05AC/TO3_0
L1 L2 L3 L4 L5 L6 L7 L8 L9 L10: library part L
MIOC: "Header, 3-Pin"
OSC1: library part XTAL_D75A
PHOTODETECTOR: library part BYW29-150
POWER: "Header, 2-Pin"
R1 R5 R8 R21 R39: library part RES, "Resistor"
R2 R3 R4 R15 R16 R17 R29 R30 R31 R33 R34 R35 R36 R58 R75 R76: library part R06, "Resistor Thick film 5%"
R6 R7 R9 R10 R11 R12 R13 R14 R18 R19 R20 R22 R23 R24 R25 R26 R27 R28 R32 R37 R38 R40 R41 R42 R43 R44 R45 R46 R47 R48 R49 R50 R51 R52 R53 R54 R55 R56 R57 R59 R60 R61 R62 R63 R64 R65 R66 R67 R68 R69 R70 R71 R72 R73 R74: library part R08, "Resistor Thick film 1%"

## Free pads (board coordinates)
  round 5 hole 4: 0(37.211,38.735) 0(37.211,125.857) 0(98.679,38.735) 0(98.679,125.857)

## Via types
v1: diameter 1.27, hole 0.711, ANALOG to DIGITAL, 198 vias
v2: diameter 1.1, hole 0.711, ANALOG to DIGITAL, 7 vias
v3: diameter 1.7, hole 1.5, ANALOG to DIGITAL, 2 vias

## Nets (pads, with @x,y where several pads share a name; then routed paths per layer and width w, separated by ;. In a path a pad name is that pad's centre, name@x,y a point inside that pad or via, vN(x,y) a via of type N, cw(c..) or ccw(c..) an arc to the next point about the centre after c; other vN are vias at no path point)
+3V3D: C1.2 C2.2 C3.2 C4.2 C5.2 C6.2 C7.2 C8.2 C9.2 C10.2 C11.2 C12.2 C51.2 C55.2 C106.2 C108.1 C126.2 D1.A D2.A IC4.11 IC4.26 IC4.37 IC4.42 IC4.54 IC9.1 IC10.5 IC16.3 IC18.1 IC18.3 JTAG.7 L1.1 Output.3 R2.2 R3.1 R15.1 R40.2 R58.2 RX.A TX.A | length 108.2
  ANALOG w0.25: D1.A@52.575,65.817 50.642,65.817 v1(50.546,65.913) 50.546,66.167 D2.A@52.578,68.199 ; v1(65.913,65.532) v1@65.913,66.04
  ANALOG w0.6: v1@81.407,71.755 RX.A@81.407,72.898
  DIGITAL w0.25: v1@44.386,85.661 50.673,91.948 R58.2@51.562,91.948 ; v1(53.467,77.47) C2.2@55.499,77.47 C1.2@57.531,77.47 58.602,77.47 58.995,77.077 59.309,77.077 IC4.26@60.592,77.077 ; IC10.5@56.515,86.868 v1(58.547,86.868) ; C12.2@61.468,87.376 C11.2@63.373,87.376 C10.2@63.373,85.344 63.373,84.455 64.008,83.82 64.799,83.82 65.052,83.567 IC4.37@65.052,82.537 65.052,81.379 65.278,81.153 67.31,81.153 67.552,81.395 IC4.42@67.552,82.537 R3.1@67.552,84.824 ; IC4.11@65.552,70.117 65.552,69.087 65.332,68.867 65.057,68.867 C7.2@63.881,67.691 64.008,67.564 C8.2@65.913,67.564 v1(65.913,65.532) ; R3.1@67.691,84.963 67.691,85.217 R15.1@69.596,87.122 ; IC4.54@73.012,77.577 C4.2@76.327,77.577 ; C4.2@76.327,77.724 C5.2@78.359,77.724 v1(80.391,77.724) 80.645,77.724 81.915,76.454 81.915,75.057 C55.2@83.439,73.533 ; v1@82.042,72.136 C55.2@83.439,73.533 ; IC9.1@85.725,75.057 84.963,75.057 C55.2@83.439,73.533
  DIGITAL w0.6: v1(82.042,71.755) v1@82.042,72.136 ; IC18.3@97.118,94.333 96.106,94.333 95.664,94.775 95.664,95.537 96.36,96.233 IC18.1@97.118,96.233 98.646,96.233 v1(98.966,96.553)
  DIGITAL w1.3: IC16.3@42.037,76.2 43.942,78.105 ; v1(43.942,64.77) 43.942,78.105 ; v1(43.942,94.234) v1(43.942,91.059) v1(43.942,88.646) v1(43.942,86.106) 43.942,85.749 43.744,85.552 43.744,79.192 v1(43.942,78.994) 43.942,78.105
  other v1: 73.152,65.532 43.942,69.977 43.942,72.517 43.942,75.057 43.942,81.407 83.439,81.915 61.341,87.503 56.388,89.027
+3VD: C130.2 IC18.5 L5.1 L6.2 L9.1 L10.2 | length 57.6
  ANALOG w0.25: v1(98.707,120.622) L5.1@98.707,121.765
  ANALOG w0.4: L9.1@78.387,100.096 79.804,98.679 99.06,98.679 100.046,99.665 100.046,104.424 v1(99.469,105.001)
  ANALOG w1.3: L9.1@78.387,100.096 v1(78.387,100.302)
  DIGITAL w0.25: v1@98.58,120.622 v1(98.707,120.622)
  DIGITAL w0.6: IC18.5@94.464,96.233 94.836,96.233 99.469,100.866 v1(99.469,105.001) 97.522,106.948 97.522,119.564 v1@98.58,120.622
+5VA: C13.2 C14.2 C23.1 C24.2 C30.2 C31.2 C42.2 C43.2 C48.2 C49.1 C50.1 C63.1 C68.1 C69.1 C71.1 C72.1 C73.2 C85.1 C86.1 C88.1 C89.2 C91.1 C96.1 C97.1 C98.2 C101.2 C102.2 C103.2 C104.2 C105.2 C107.1 C119.1 C120.2 C127.1 C128.2 C132.1 C133.2 IC1.8 IC2.2 IC3.5 IC5.8 IC7.3 IC11.2 IC12.2 IC13.8 IC14.2 IC15.1 IC15.7 IC15.11 IC15.12 IC15.53 IC16.1 IC17.2 L2.1 L3.1 L4.1 L7.1 Output.4 R4.2 R45.1 U1.7 | length 146.3
  ANALOG w0.25: v1(36.576,45.212) 37.561,44.227 41.052,44.227 41.275,44.45 IC11.2@41.275,45.396 ; v1(36.83,62.103) C132.1@37.338,62.611 ; R45.1@39.624,51.943 C63.1@39.624,53.848 ; IC7.3@49.022,54.483 IC7.3@49.53,54.483 IC7.3@49.911,54.483 ; v1(50.066,118.717) C89.2@52.098,118.717 53.876,118.717 54.272,118.321 IC12.2@54.272,117.447 ; v1(50.165,45.212) 51.15,44.227 54.493,44.227 54.864,44.598 IC14.2@54.864,45.396 ; v1(53.721,60.579) 53.721,60.401 51.689,58.369 51.689,56.515 53.086,55.118 54.61,55.118 IC5.8@55.753,56.261 ; v1(54.511,113.383) 54.892,113.383 IC13.8@56.035,112.24 ; IC17.2@65.433,101.587 66.088,101.587 67.465,100.21 C120.2@67.465,100.175 v1(69.497,100.175) ; C13.2@66.421,58.293 67.183,57.531 IC1.8@67.183,56.261 ; C13.2@66.548,58.293 v1(66.548,60.325) ; U1.7@66.83,117.32 66.83,118.082 67.084,118.336 68.1,118.336 68.862,117.574 C72.1@69.116,117.574 ; C72.1@69.243,117.574 69.624,117.574 70.64,118.59 74.577,118.59 75.593,117.574 C71.1@75.847,117.574 v1(77.244,117.574) C96.1@78.641,117.574 C97.1@80.597,117.574 ; v1(70.866,60.579) 71.029,60.742 76.037,60.742 76.263,60.515 IC3.5@76.263,59.442 ; C101.2@75.085,102.334 77.117,104.366 v1(77.117,104.62) ; IC2.2@78.359,48.021 79.487,48.021 C24.2@80.264,47.244 v1(82.296,47.244) ; C102.2@79.149,108.684 79.149,108.402 78.006,107.259 78.006,105.509 v1(77.117,104.62) ; C102.2@79.403,108.811 79.403,109.347 ; 79.403,109.474 79.914,109.985 80.549,109.985 80.769,110.205 80.769,111.574 81.169,111.974 IC15.7@82.718,111.974 ; C97.1@80.622,117.599 82.718,115.504 IC15.1@82.718,114.974 ; IC15.12@82.718,109.474 81.452,109.474 ; IC15.11@82.718,109.974 81.952,109.974 81.452,109.474 ; IC15.53@90.043,116.799 90.043,117.963 90.662,118.582 91.206,118.582 C69.1@92.04,119.415 ; C69.1@92.23,119.606 v1(94.262,119.606) ; v1(77.117,104.62) C104.2@79.149,104.62 80.134,105.605 80.134,107.16 80.8,107.826 80.8,108.822 81.452,109.474
  ANALOG w0.5: v1(41.148,58.293) C49.1@43.18,58.293 C50.1@45.212,58.293 IC7.3@49.022,54.483
  ANALOG w0.8: C132.1@37.338,62.357 C133.2@38.989,62.357
  ANALOG w2: C91.1@45.974,99.314 46.482,99.822 v1(46.482,100.838) v1(46.482,102.489)
  VCC w0.6: 83.502,55.055 Output.4@87.249,55.055
  DIGITAL w0.25: IC16.1@37.338,76.327 IC16.1@37.465,76.2 ; v1@46.228,102.743 v1(46.482,102.489) ; L7.1@46.482,97.409 47.879,97.409 50.577,94.711 50.577,93.469 50.828,93.218 54.229,93.218 R4.2@56.388,91.059
  DIGITAL w1: IC16.1@37.338,76.327 C127.1@37.338,82.677
  DIGITAL w1.2: C128.2@44.831,102.743 v1@46.228,102.743
  DIGITAL w2: L7.1@46.482,98.171 v1(46.482,99.187) v1(46.482,100.838) v1(46.482,102.489)
  other v1: 39.751,51.816 80.391,60.579 39.116,62.611 37.465,75.692 37.338,78.486 37.338,82.55 75.946,99.568
+5VD_ISOL: C60.1 C61.1 IC9.16 Output.9 R29.2 | length 43.7
  DIGITAL w0.25: Output.9@90.085,53.658 95.25,58.822 95.25,74.803 95.504,75.057 96.901,73.66 98.552,73.66 99.314,74.422 99.314,83.864 97.834,85.344 R29.2@97.663,85.344 ; C60.1@95.631,85.852 C61.1@95.631,88.011 ; C60.1@95.885,85.598 R29.2@97.409,85.598
-5VA1: C34.2 C35.1 C100.1 IC5.4 R55.2 | length 11.1
  ANALOG w0.25: IC5.4@57.703,51.435 57.73,51.435 59.334,49.831 59.334,49.53 v1(61.468,49.53)
  ANALOG w0.35: R55.2@59.563,45.212 v1(61.595,45.212)
  DIGITAL w0.25: v1(61.468,49.53) v1@61.595,49.403
  DIGITAL w0.5: v1(61.595,45.212) v1@61.595,49.403
-5VA2: C38.2 C40.1 C41.1 C63.2 C75.1 IC7.6 R44.2 R50.2 | length 21.9
  ANALOG w0.25: C63.2@41.91,53.848 42.545,54.483
  ANALOG w0.3: IC7.6@43.84,54.483 45.212,54.483 45.72,53.975 45.72,48.26 C40.1@46.736,47.244
  ANALOG w0.35: C40.1@46.736,47.244 46.736,45.974 R50.2@45.974,45.212 C75.1@48.006,45.212
  ANALOG w0.5: C63.2@41.91,53.848 R44.2@41.91,55.88 ; 42.545,54.483 IC7.6@43.84,54.483 ; C40.1@46.736,47.244 C41.1@48.768,47.244 C38.2@50.8,47.244
\R\S\T\: C36.1 IC4.38 JTAG.5 R15.2 RST.1 | length 41
  ANALOG w0.25: RST.1@71.374,89.789 71.374,89.662 v1(73.914,87.122)
  VCC w0.25: v1(73.914,87.122) 77.343,90.551 82.296,90.551 82.528,90.319 87.525,90.319 JTAG.5@88.9,91.694
  DIGITAL w0.25: IC4.38@65.552,82.537 65.552,83.8 65.526,83.8 65.006,84.32 64.905,84.32 64.516,84.709 64.516,87.983 65.179,88.646 66.04,88.646 67.406,90.012 72.548,90.012 72.771,89.789 72.771,87.884 R15.2@71.882,86.995 C36.1@73.787,86.995
AD_CLK: IC15.55 R1.2 R21.2 | length 54.4
  ANALOG w0.25: IC15.55@89.043,116.799 v2@89.043,118.324
  DIGITAL w0.25: R1.2@69.469,95.504 R1.2@69.723,95.504 70.866,94.361 72.39,94.361 ; R21.2@73.914,91.313 72.771,92.456 72.771,93.98 72.39,94.361 ; v2(89.055,118.336) 92.611,118.336 93.234,117.713 93.234,106.205 92.05,105.021 90.471,105.021 89.582,104.133 89.582,101.089 89.723,100.949 89.723,99.112 88.94,98.329 88.94,96.667 88.342,96.069 81.972,96.069 80.264,94.361 72.39,94.361
AD_CS: IC4.47 R59.2 | length 34
  DIGITAL w0.25: IC4.47@70.052,82.537 70.052,83.567 72.464,85.979 78.143,85.979 80.423,88.259 80.423,93.07 82.422,95.069 88.757,95.069 89.94,96.252 89.94,97.915 90.797,98.772 90.797,99.814 R59.2@91.567,100.584
AD_DRDY: IC15.46 R6.1 | length 44.7
  ANALOG w0.25: IC15.46@93.868,113.974 94.853,113.974 v2(95.659,114.78)
  DIGITAL w0.25: R6.1@75.946,87.122 76.454,86.614 78.071,86.614 79.923,88.466 79.923,93.277 82.215,95.569 88.55,95.569 89.44,96.459 89.44,98.122 90.297,98.979 90.297,101.377 90.082,101.592 90.082,103.842 90.678,104.438 90.678,104.521 92.257,104.521 93.734,105.998 93.734,112.766 95.659,114.691 v2(95.659,114.78)
AD_START: IC4.60 R61.2 | length 45
  DIGITAL w0.25: IC4.60@73.012,74.577 71.6,74.577 69.729,76.448 69.729,78.65 72.883,81.804 76.089,81.804 81.923,87.638 81.923,92.449 83.043,93.569 89.378,93.569 91.44,95.631 91.44,97.282 93.757,99.599 94.584,99.599 95.568,100.584 R61.2@95.631,100.584
ARM_CLK: IC4.40 R5.2 R8.2 | length 11.2
  DIGITAL w0.25: IC4.40@66.552,82.537 66.552,84.074 66.706,84.228 66.706,88.268 67.465,89.027 R5.2@69.723,89.027 R8.2@71.755,89.027
CGND: pad.0@37.211,125.857 R76.1 | length 3.6
  ANALOG w1.2: R76.1@37.465,122.174 pad.0@37.465,125.73
D+: IC9.12 Output.6 R29.1 R30.1 | length 25.9
  DIGITAL w0.25: Output.6@90.085,61.976 91.821,63.712 91.821,78.359 93.599,80.137 IC9.12@95.377,80.137 96.52,80.137 R30.1@97.663,81.28 R29.1@97.663,83.058
D-: IC9.13 Output.7 R30.2 R33.2 | length 26.7
  DIGITAL w0.25: Output.7@90.085,59.203 92.837,61.955 92.837,77.597 94.107,78.867 IC9.13@95.377,78.867 97.536,78.867 R30.2@97.663,78.994 R33.2@97.663,77.216
DA_CS: IC4.57 IC4.59 IC8.8 | length 42.6
  ANALOG w0.25: IC8.8@59.69,58.42 60.258,58.42 61.341,59.503 v1(61.341,60.071)
  VCC w0.25: v1(61.087,62.103) 61.849,62.865 61.849,66.167 63.748,68.066 78.619,68.066 v1@78.867,67.818
  DIGITAL w0.25: v1(61.341,60.071) v1@61.341,62.103 ; IC4.59@73.012,75.077 71.862,75.077 71.755,75.184 71.755,75.946 71.886,76.077 IC4.57@73.012,76.077 74.418,76.077 74.795,75.7 74.795,70.637 77.36,68.072 v1@78.994,68.072
  other v1: 78.867,67.564
DA_CS-: Emulator.6 R27.1 | length 22.2
  DIGITAL w0.25: Emulator.6@45.932,76.327 49.403,76.327 50.728,75.002 50.728,68.779 52.101,67.406 52.101,66.291 52.321,66.071 53.851,66.071 54.071,66.291 54.071,69.946 55.245,71.12 R27.1@55.372,71.12
DA_REF_CLK: C20.2 IC4.31 R11.2 | length 29.2
  DIGITAL w0.25: IC4.31@60.592,79.577 66.727,79.577 68.199,78.105 68.199,75.819 76.2,67.818 76.2,64.389 R11.2@78.994,61.595
DA_REF_CS: IC4.7 R12.2 | length 13.6
  DIGITAL w0.25: IC4.7@67.552,70.117 67.552,68.973 67.691,68.834 68.707,68.834 69.381,68.16 69.381,65.112 69.977,64.516 72.136,64.516 72.898,63.754 R12.2@72.898,60.579
DGND_ISOL: C60.2 C61.2 IC9.9 IC9.15 Output.8 R33.1 | length 43.5
  DIGITAL w0.25: Output.8@90.085,56.43 93.726,60.071 93.726,75.819 94.234,76.327 IC9.15@95.377,76.327 96.266,76.327 R33.1@97.663,74.93 98.806,76.073 98.806,83.566 98.648,83.724 98.648,83.823 98.428,84.043 95.473,84.043 IC9.9@95.377,83.947 95.123,83.947 C60.2@93.281,85.788 ; C60.2@93.345,85.852 C61.2@93.345,88.011
DIR: IC4.53 IC9.4 IC9.5 R32.2 | length 16.4
  DIGITAL w0.25: IC4.53@73.012,78.077 74.775,78.077 75.692,78.994 82.296,78.994 R32.2@83.439,80.137 ; IC9.4@85.725,78.867 84.709,78.867 R32.2@83.439,80.137 ; IC9.5@85.725,80.137 R32.2@83.439,80.137
EMUL_CS: Emulator.8 IC4.43 | length 35
  DIGITAL w0.25: Emulator.8@45.932,81.873 45.932,82.321 44.769,83.483 44.769,85.127 47.653,88.011 59.563,88.011 59.944,87.63 59.944,84.074 63.373,80.645 67.564,80.645 68.052,81.133 IC4.43@68.052,82.537